# Altium PCB LSE_Piezo_Driver.PcbDoc
Units mil, origin at the board's own origin, x right, y up, seen from the top; angles counter-clockwise.
Board outline 3808.03 x 6368.03 mil, 2 copper layers (Top Layer, Bottom Layer); 77 components, 75 nets, 330 pads, 16 vias.
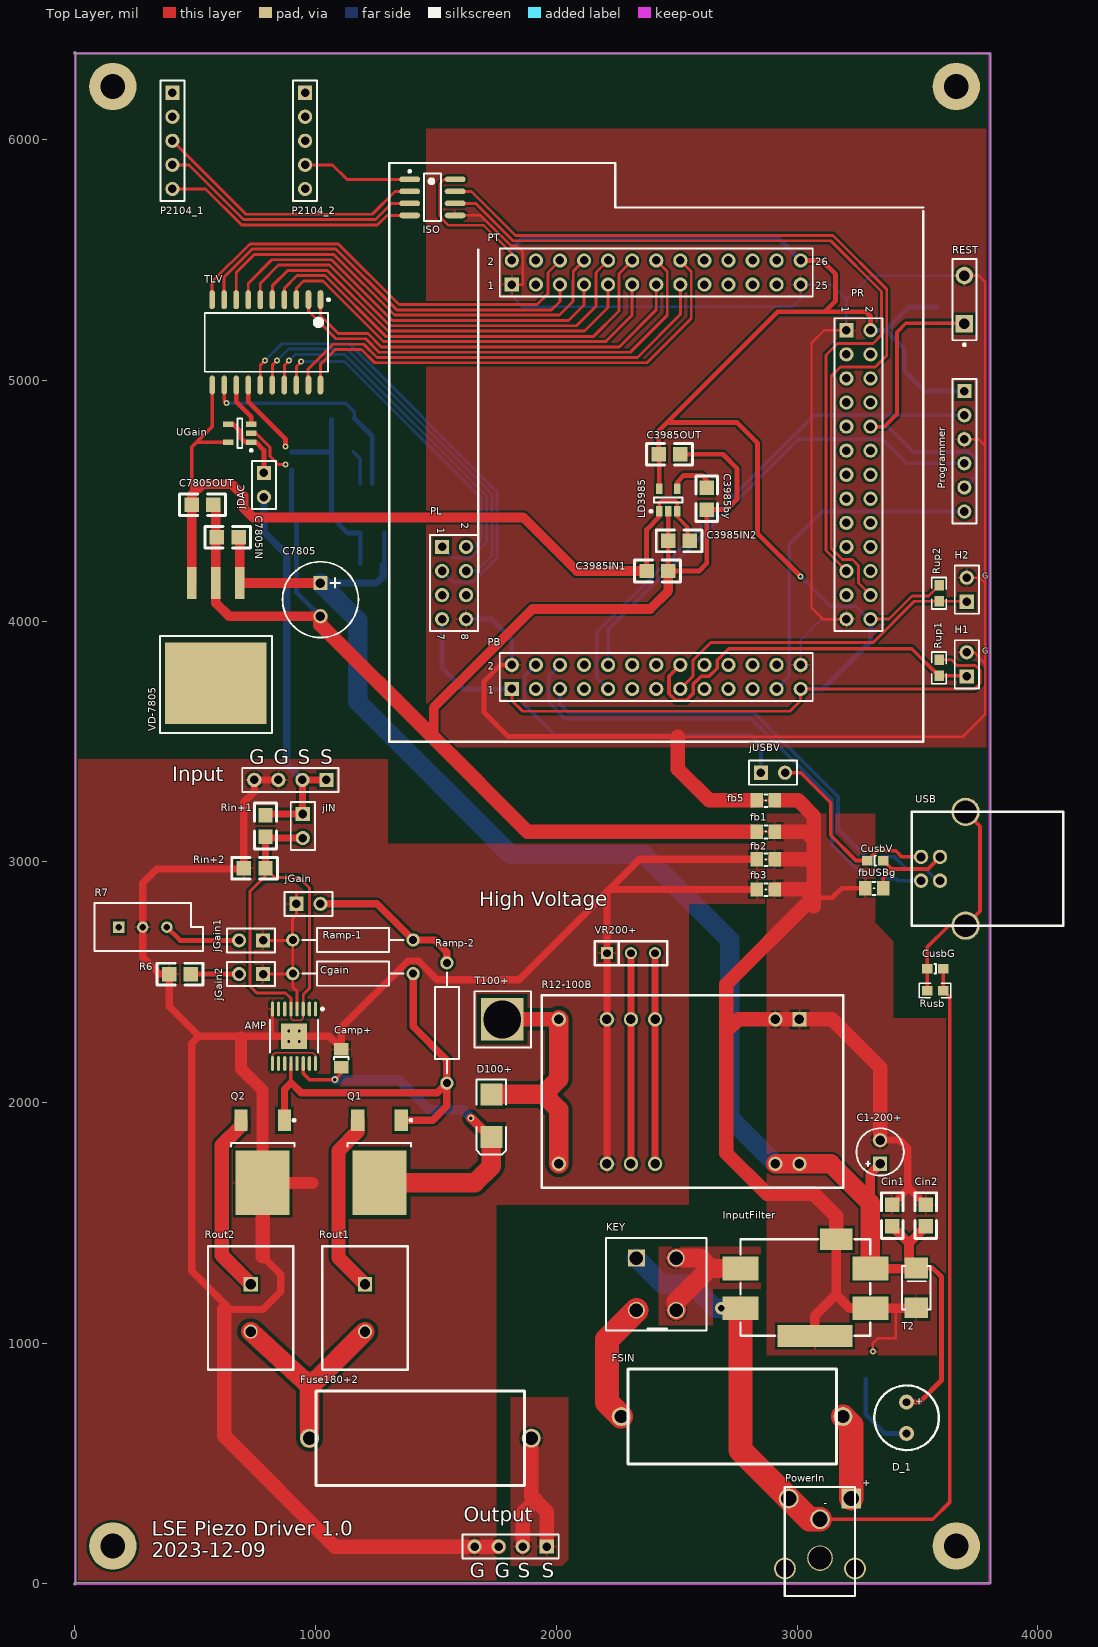
[diagram p0: Top Layer view]
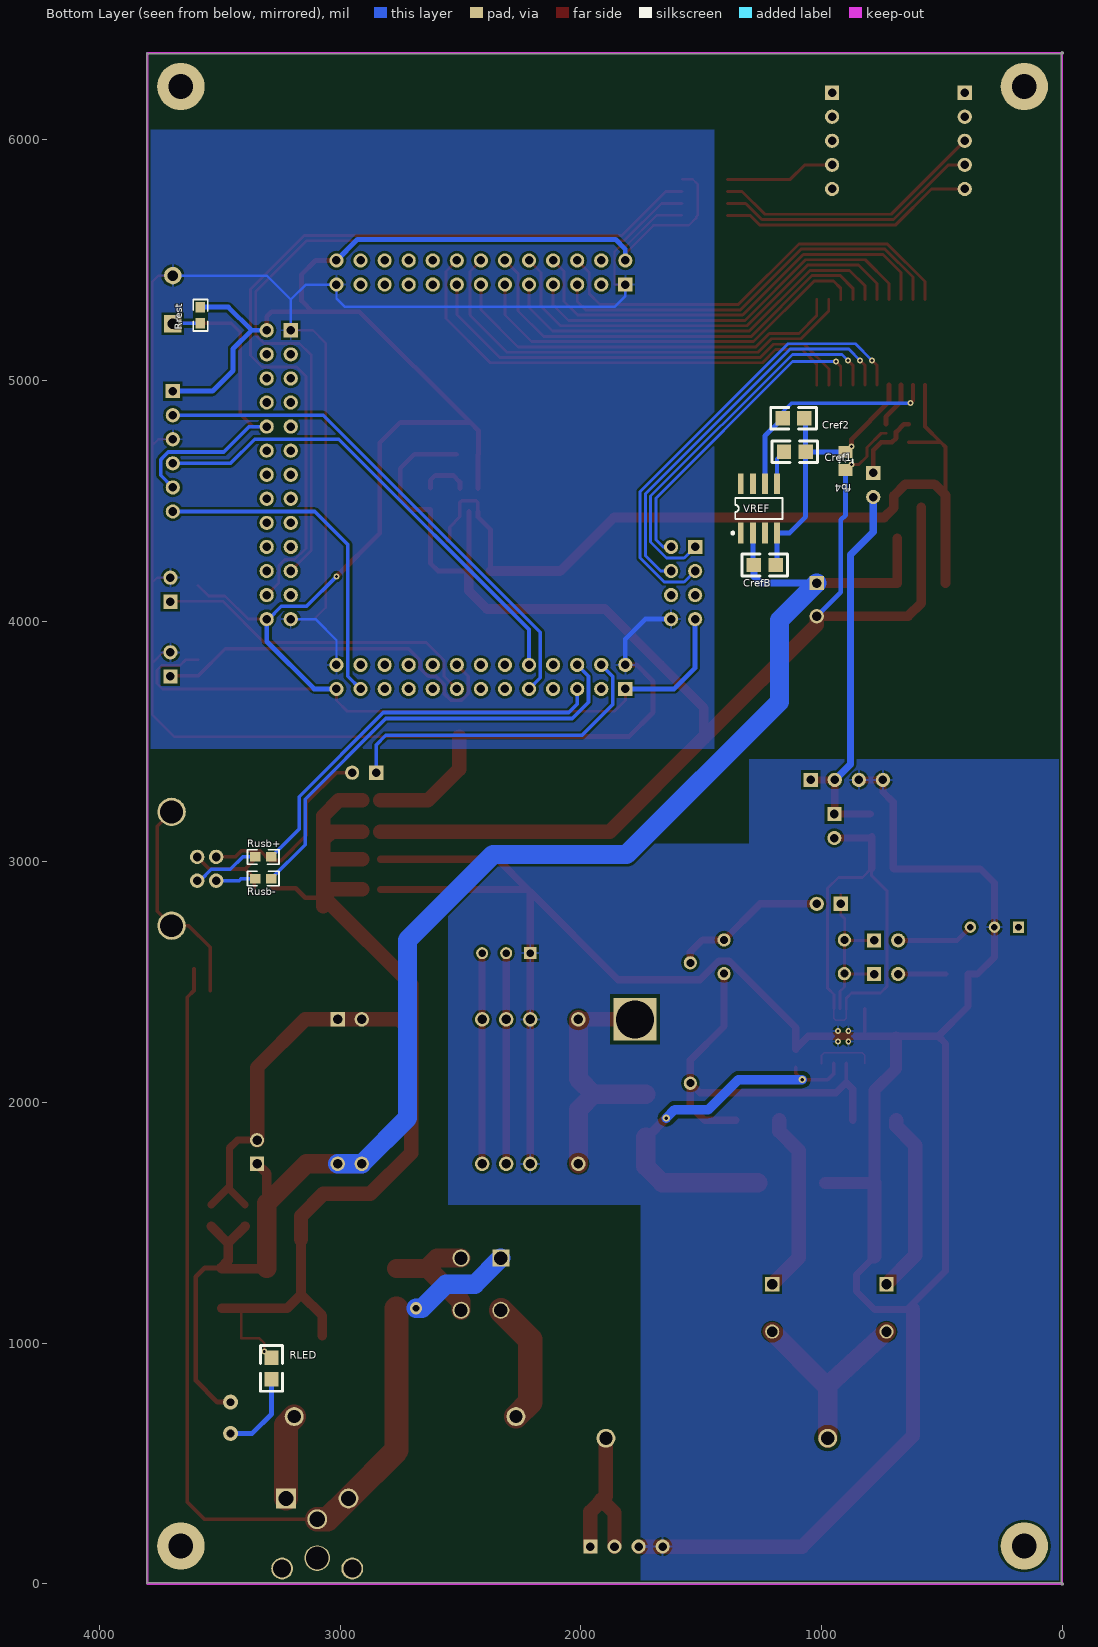
[diagram p1: Bottom Layer view, seen from below]

## Layer stack, top to bottom
Top Solder: solder mask 0.4, Solder Resist, Dk 3.5
Top Layer: signal copper 1.4
Dielectric 1: dielectric 12.6, FR-4, Dk 4.8
Bottom Layer: signal copper 1.4
Bottom Solder: solder mask 0.4, Solder Resist, Dk 3.5

## Board outline
-4.02,0 cw(c0,0) 0,4.02 3800,4.02 cw(c3800,0) 3804.02,0 3804.02,6360 cw(c3800,6360) 3800,6355.98 0,6355.98 cw(c0,6360) -4.02,6360 cw(c0,6360) 0,6364.02 cw(c0,6360) 4.02,6360 4.02,0 cw(c0,0) 0,-4.01 cw(c0,0)

## Design rules (kind name [scope] priority, off if disabled: settings)
Clearance HV [InNet('AMPGND') vs (InNet('V100+') OR InNet('NetFuse180+2_1')OR InNet('Netd100+_1'))] p1: gap=15 ignorepadtopadclearanceinfootprint=FALSE except(0: Arc-Hole Track-Hole SMDPad-Hole THPad-Hole Via-Hole Fill-Hole Poly-Hole Region-Hole Text-Hole)
Clearance Clearance_1 [All] p2: gap=10 ignorepadtopadclearanceinfootprint=FALSE except(0: Arc-Hole Track-Hole SMDPad-Hole THPad-Hole Via-Hole Fill-Hole Poly-Hole Region-Hole Text-Hole)
DiffPairsRouting [All] p1: maxlimit=10 minlimit=10 mostfreqgap=10 toplayer_minwidth=15 toplayer_maxwidth=15 toplayer_prefwidth=15 bottomlayer_minwidth=15 bottomlayer_maxwidth=15 bottomlayer_prefwidth=15 maxuncoupledlength=500
HoleSize [All] p1: absolutevalues=TRUE maxlimit=100 minlimit=11.81 maxpercent=80.000 minpercent=20.000
PolygonConnect [All] p1: connectstyle=Relief reliefconductorwidth=10 reliefentries=4 polygonreliefangle="90 Angle" airgapwidth=10
RoutingVias [All] p1: holewidth=28 width=50 viastyle="Through Hole" minholewidth=11.81 minwidth=20 maxholewidth=28 maxwidth=50
SolderMaskExpansion [All] p1: expansion=4 istentingtop=FALSE
Width [All] p1: maxlimit=100 minlimit=6 preferedwidth=10
Width 12V [(InNet('IN+12') OR InNet('INGND'))] p2: maxlimit=100 minlimit=10 preferedwidth=20
28 further rules are at their usual default settings.

## Classes and differential pairs
component class AMP: AMP Camp+ Cgain Fuse180+2 Input j4 jDAC jGain jGain1 jGain2 jIN Output Q1 Q2 R1 R2 R6 R7 Ramp-1 Ramp-2 Rin+1 Rin+2 Rout1 Rout2
component class power: C1-200+ C3985by C3985IN1 C3985IN2 C3985OUT C7805 C7805IN C7805OUT Cin1 Cin2 Cref1 Cref2 CrefB D100+ D_1 fb1 fb2 fb3 fb4 fb5 FSIN InputFilter KEY LD3985 "Power Filter" PowerIn R12-100B R12-150B+ RLED T2 T100+ VD-7805 VR200+ VREF
component class piezo_driver: CusbG CusbV fbUSBg H1 H2 ISO j3 j4 jUSBV Lusb P2104_1 P2104_2 PB PL PR Programmer PT REST Rrest Rup1 Rup2 Rusb Rusb+ Rusb- TLV UGain USB
differential pair INUSB: +INUSB_P -INUSB_N
differential pair USB: +USB_P -USB_N

## Components (designator, comment, footprint, x,y, rotation, side; value= is the part's Value field where it differs from the comment)
AMP "LTC6090HFE#PBF" LT-FE-16-EPV-BA_N 910,2275 r270 top
C1-200+ "?" Cap_Rad2.5 3345,1745 r90 top
C3985by "10n" 0805 2625,4462.8 r90 top
C3985IN1 "1u" 0805 2465,4207.8 r180 top
C3985IN2 "100n" 0805 2465,4332.8 r0 top
C3985OUT "1u" 0805 2515,4692.8 r180 top
C7805 "?" Cap_Rad4mm 1020,4157.8 r270 top
C7805IN "0.33u" 0805 590,4347.8 r0 top
C7805OUT "0.1u" 0805 575,4482.8 r180 top
Camp+ "445-6808-1-ND" C_0805 1106.65,2183.35 r270 top
Cgain "?" AXIAL-0.5 1155,2535 r0 top
Cin1 "Cap" 0805 3395,1485 r90 top
Cin2 "Cap" 0805 3535,1485 r90 top
Cref1 "1u" 0805 1065.94,4702.8 r0 bottom
Cref2 "22u" 0805 1070.94,4842.8 r0 bottom
CrefB "1u" 0805 1190.94,4232.8 r0 bottom
CusbG "?" C_0603 3573.93,2555 r180 top
CusbV "?" C_0603 3325,3005 r0 top
D100+ "Diode 1N4007" SMB 1730,1945 r270 top
D_1 "LED" LIGHT 3455,755 r270 top
fb1 "MH2029-300YCT-ND" FB_0805 2870,3125 r180 top
fb2 "MH2029-300YCT-ND" FB_0805 2870,3010 r180 top
fb3 "MH2029-300YCT-ND" FB_0805 2870,2885 r180 top
fb4 "MH2029-300YCT-ND" FB_0805 900,4665 r270 bottom
fb5 "MH2029-300YCT-ND" FB_0805 2870,3255 r180 top
fbUSBg "MH2029-300YCT-ND" FB_0805 3320,2890 r180 top
FSIN "Fuse" FuseHolder 2730,695 r180 top
Fuse180+2 "Fuse" FuseHolder 1435,605 r0 top
H1 "Header 2" HDR1X2 3705,3770 r90 top
H2 "Header 2" HDR1X2 3705,4080 r90 top
Input "Header 4" HDR1X4 1045,3340 r180 top
InputFilter "BNX022" BNX022 2690,985 r0 top
ISO "ISO7221CDR" D0008A_N 1485,5760 r0 top
jDAC "Jumper" HDR1X2 785,4615 r270 top
jGain "Jumper" HDR1X2 920,2825 r0 top
jGain1 "Jumper" HDR1X2 781.65,2673.35 r180 top
jGain2 "Jumper" HDR1X2 781.65,2533.35 r180 top
jIN "Jumper" HDR1X2 946.65,3198.35 r270 top
jUSBV "Jumper" HDR1X2 2850,3370 r0 top
KEY "Header 2X2" Power4Pin 2415,1245 r0 top
LD3985 "LD3985G33R" TSOT23-5L_N 2465,4502.8 r90 top
Output "Header 4" HDR1X4 1960,155 r180 top
P2104_1 "Header 5" HDR1X5 405,6195 r270 top
P2104_2 "Header 5" HDR1X5 956.18,6195 r270 top
PB "Header 13X2" HDR2X13 1815,3717.8 r0 top
PL "Header 4X2" HDR2X4 1525,4307.8 r270 top
PowerIn "Header 4" AC/DC3 3225,355 r0 top
PR "Header 13X2" HDR2X13 3205,5207.8 r270 top
Programmer "Header 6" HDR1X6 3695,4955 r270 top (schematic designator P5)
PT "Header 13X2" HDR2X13 1815,5397.8 r0 top
Q1 "IRFR120N" INF-PG-TO252 1265,1745 r270 top
Q2 "IRFR9120N" INF-PG-TO252 780,1745 r270 top
R6 "?" 0805 391.65,2533.35 r0 top
R7 "RPot" VR5 281.65,2728.35 r0 top
R12-100B "R12-150B" R12-150B 3010,2345 r180 top
Ramp-1 "?" AXIAL-0.5 1155,2675 r0 top
Ramp-2 "?" AXIAL-0.5 1545,2330 r270 top
REST "SW-PB" SPST-2 3695,5335 r90 top (schematic designator S1)
Rin+1 "?" 0805 791.65,3193.35 r270 top
Rin+2 "?" 0805 701.65,2973.35 r0 top
RLED "?" 0805 3285,850 r90 bottom
Rout1 "?" Res_5w 1205,1245 r270 top
Rout2 "?" Res_5w 730,1245 r270 top
Rrest "?" 0603 3580,5235 r90 bottom
Rup1 "?" 0603 3590,3770 r90 top
Rup2 "?" 0603 3590,4080 r90 top
Rusb "?" 0603 3608.93,2465 r180 top
Rusb+ "?" 0603 3355,3020 r180 bottom
Rusb- "?" 0603 3355,2930 r180 bottom
T2 "SMAJ150CA-E3/61GICT-ND" DO-214AC 3495,1230 r270 top
T100+ "Socket" hole 1775,2345 r0 top
TLV "TLV5619" DW020_L 795,5157.8 r270 top
UGain "OPA333AIDBVR" TI-DBV5_N 685,4780 r180 top
USB "USB" USB-B 3515,3020 r180 top
VD-7805 "LM7805" 7805 685,4157.8 r90 top
VR200+ "RPot" VR 2210,2620 r0 top
VREF "REF5025" SO8 1260,4467.8 r180 bottom

## Footprints (in the part's own frame and the unit in brackets; to place one, negate y for a bottom-side part, rotate by r counter-clockwise, add the part's x,y. Pads: shape width x height; smd on the part's side, far side on the other; paste and mask are expansions set on the pad)
0603 [mm]
  rect 1.1x1 smd: 1(0.051,0) 2(1.751,0)
  silkscreen extent -0.76,-0.76 2.57,0.76
0805 [mil]
  rect 60x60 smd: 1(0,0) 2(90,0)
  silkscreen extent -50,-45 140,45
7805 [mm]
  rect 3.4x1 smd: 1(0,0) 2(0,2.54) 3(0,5.08)
  rect 8.6x10.7 smd: 4(-10.6,2.54)
  silkscreen extent -15.82,-3.4 -5.59,8.43
AC/DC3 [mm]
  rect 2.1x2.1 hole 1.6: 1(0,0)
  round 2.1 hole 1.6: 2(-3.3,-2.2) 3(-6.6,0)
  round 2.3 hole 1.9: 4(-7,-7.4) 5(0.4,-7.4)
  round 2.7 hole 2.4: 6(-3.3,-6.3)
  silkscreen extent -7.01,-10.3 0.4,1.2
AXIAL-0.5 [mm] "Axial Device, Thru-Hole; 2 Leads; 0.5 in Pin Spacing"
  round 1.4 hole 0.85: 1(-6.35,0) 2(6.35,0)
  silkscreen extent -5.33,-1.27 5.33,1.27
BNX022 [mm] "EMI Filter"
  rect 3.8x2.5 smd: 1(1.9,8.25) 2(15.6,8.25) 3(1.9,4.05) 4(15.6,4.05)
  rect 7.9x2.3 smd: 4(9.75,1.15)
  rect 3.4x2.3 smd: 4(12,11.35)
  silkscreen extent 1.9,1.15 15.6,11.35, body extent 2.12,1.38 15.38,11.12, height 3.1
C_0603 [mm] "Chip Capacitor; Body 1.6 x 0.8 mm (LxW typ)"
  rect 1.1x1 smd: 1(-0.85,0) 2(0.85,0)
  silkscreen extent -0.1,-0.51 0.1,0.51, body extent -0.76,-0.38 0.76,0.38, height 0.46
C_0805 [mm] "capacitor, 0805"
  rect 1.3x1.5 smd: 1(-0.95,0) 2(0.95,0)
  silkscreen extent -0.13,-0.76 0.13,0.76, body extent -1.02,-0.64 1.02,0.64, height 0.64
Cap_Rad2.5 [mm] "PartNO 493-3283-ND: radius=4mm, pins space=3.5 mm, height=9mm"
  rect 1.5x1.5 hole 1: 1(0,0)
  round 1.5 hole 1: 2(2.5,0)
  silkscreen extent -1.25,-2.5 3.75,2.5, body extent -1.26,-2.52 3.72,2.47, height 9
Cap_Rad4mm [mm] "PartNO 493-3283-ND: radius=4mm, pins space=3.5 mm, height=9mm"
  rect 1.5x1.5 hole 1: 1(0,0)
  round 1.5 hole 1: 2(3.5,0)
  silkscreen extent -2.25,-4 5.75,4, body extent -2.31,-3.94 5.66,4.05, height 9
D0008A_N [mm] "SOIC, 8-Leads, Body 5x4mm, Pitch 1.27mm, IPC Medium Density"
  oval 2.2x0.6 smd: 1(-2.4,1.905) 2(-2.4,0.635) 3(-2.4,-0.635) 4(-2.4,-1.905) 5(2.4,-1.905) 6(2.4,-0.635) 7(2.4,0.635) 8(2.4,1.905)
  silkscreen extent -2.52,-2.5 0.9,2.88, body extent -2,-2.5 2,2.5, height 1.75
DO-214AC [mm] "TVS"
  rect 2.2x2.5 smd: A(2.1,0) K(-2.1,0)
  silkscreen extent -2.3,-1.5 2.3,1.5, body extent -2.6,-1.5 2.6,1.5, height 2
DW020_L [mm]
  oval 2x0.6 smd: 1(-4.5,5.715) 2(-4.5,4.445) 3(-4.5,3.175) 4(-4.5,1.905) 5(-4.5,0.635) 6(-4.5,-0.635) 7(-4.5,-1.905) 8(-4.5,-3.175) 9(-4.5,-4.445) 10(-4.5,-5.715) 11(4.5,-5.715) 12(4.5,-4.445) 13(4.5,-3.175) 14(4.5,-1.905) 15(4.5,-0.635) 16(4.5,0.635) 17(4.5,1.905) 18(4.5,3.175) 19(4.5,4.445) 20(4.5,5.715)
  silkscreen extent -4.62,-6.5 3.1,6.69, body extent -3.75,-6.4 3.75,6.4, height 2.65
FB_0805 [mm] "chip body,  2.00mm x 1.25mm"
  rect 1.3x1.5 smd: 1(-0.95,0) 2(0.95,0)
  silkscreen extent -0.18,-0.64 0.15,0.71, body extent -1.02,-0.64 1.02,0.64, height 0.46
FuseHolder [mm]
  round 2 hole 1.4: 1(-11.7,0) 2(11.7,0)
  silkscreen extent -11,-5 11,5, body extent -11,-5 11.02,4.98, height 13
HDR1X2 [mm] "Connector; Header; 2 Position"
  rect 1.5x1.5 hole 0.9: 1(0,0)
  round 1.5 hole 0.9: 2(2.54,0)
  silkscreen extent -1.27,-1.27 3.81,1.27
HDR1X4 [mm] "Connector; Header; 4 Position"
  rect 1.5x1.5 hole 0.9: 1(0,0)
  round 1.5 hole 0.9: 2(2.54,0) 3(5.08,0) 4(7.62,0)
  silkscreen extent -1.27,-1.27 8.89,1.27
HDR1X5 [mm] "Connector; Header; 5 Position"
  rect 1.5x1.5 hole 0.9: 1(0,0)
  round 1.5 hole 0.9: 2(2.54,0) 3(5.08,0) 4(7.62,0) 5(10.16,0)
  silkscreen extent -1.27,-1.27 11.43,1.27
HDR1X6 [mm] "Connector; Header; 6 Position"
  rect 1.5x1.5 hole 0.9: 1(0,0)
  round 1.5 hole 0.9: 2(2.54,0) 3(5.08,0) 4(7.62,0) 5(10.16,0) 6(12.7,0)
  silkscreen extent -1.27,-1.27 13.97,1.27
HDR2X4 [mm] "Connector; Header; 4x2 Position"
  rect 1.5x1.5 hole 0.9: 1(0,0)
  round 1.5 hole 0.9: 2(0,2.54) 3(2.54,0) 4(2.54,2.54) 5(5.08,0) 6(5.08,2.54) 7(7.62,0) 8(7.62,2.54)
  silkscreen extent -1.27,-1.27 8.89,3.81
HDR2X13 [mm] "Connector; Header; 13x2 Position"
  rect 1.5x1.5 hole 0.9: 1(0,0)
  round 1.5 hole 0.9: 2(0,2.54) 3(2.54,0) 4(2.54,2.54) 5(5.08,0) 6(5.08,2.54) 7(7.62,0) 8(7.62,2.54) 9(10.16,0) 10(10.16,2.54) 11(12.7,0) 12(12.7,2.54) 13(15.24,0) 14(15.24,2.54) 15(17.78,0) 16(17.78,2.54) 17(20.32,0) 18(20.32,2.54) 19(22.86,0) 20(22.86,2.54) 21(25.4,0) 22(25.4,2.54) 23(27.94,0) 24(27.94,2.54) 25(30.48,0) 26(30.48,2.54)
  silkscreen extent -1.27,-1.27 31.75,3.81
hole [mm]
  rect 4.5x4.5 hole 4: 1(0,0)
  silkscreen extent -2.92,-2.97 3.05,2.97
INF-PG-TO252 [mm] "DPAK, 3-Leads, Body 6.57x6.1mm, Pitch 2.29mm, IPC High Density"
  rect 2.3x1.4 smd: 1(-4.6,2.29) 3(-4.6,-2.29)
  rect 6.8x5.7 smd: 2(2,0)
  silkscreen extent -4.72,-3.35 -1.8,3.44, body extent -2.2,-3.37 4.02,3.37, height 2.41
LIGHT [mil]
  round 62 hole 32: A(0,0) K(129.92,0)
  silkscreen extent -69,-134 199,134
LT-FE-16-EPV-BA_N [mm] "SOP, 16-Leads, Body 5x4.4mm, Pitch 0.65mm, Thermal Pad 2.74x2.74mm, IPC Medium Density"
  oval 1.55x0.35 smd: 1(-2.875,2.275) 2(-2.875,1.625) 3(-2.875,0.975) 4(-2.875,0.325) 5(-2.875,-0.325) 6(-2.875,-0.975) 7(-2.875,-1.625) 8(-2.875,-2.275) 9(2.875,-2.275) 10(2.875,-1.625) 11(2.875,-0.975) 12(2.875,-0.325) 13(2.875,0.325) 14(2.875,0.975) 15(2.875,1.625) 16(2.875,2.275)
  rect 2.74x2.74 smd: 17(0,0)
  silkscreen extent -3,-2.55 1.7,3.13, body extent -2.25,-2.55 2.25,2.55, height 1.1
Power4Pin [mm]
  rect 1.8x1.8 hole 1.4: 1(-2.1,2.75)
  round 1.8 hole 1.4: 2(2.1,2.75) 3(2.1,-2.75) 4(-2.1,-2.75)
  silkscreen extent -5.3,-4.88 5.3,4.88
R12-150B [mil]
  rect 60x60 hole 39.37: 2(0,0)
  round 60 hole 39.37: 3(100,0) 8(600,0) 9(700,0) 10(800,0) 12(1000,0) 13(1000,600) 15(800,600) 16(700,600) 17(600,600) 22(100,600) 23(0,600)
  silkscreen extent -181,-100 1071,700
Res_5w [mm] "pin_distance=5mm, radius=5mm"
  rect 1.5x1.5 hole 1.1: 1(0,0)
  round 1.5 hole 1.1: 2(5,0)
  silkscreen extent -4,-4.5 9.02,4.5, body extent -4.22,-4.98 9.22,5, height 25
SMB [mm] "DO-214-AA/SMB; 2 C-Bend Leads; Body 5.3 x 3.6 mm, inc. leads (LxW)"
  rect 2.3x2.3 smd: 1(-2.25,0) 2(2.25,0)
  silkscreen extent -3.8,-1.55 4.1,1.55
SO8 [mm]
  rect 0.6x2.2 smd: 1(-1.905,-2.6) 2(-0.635,-2.6) 3(0.635,-2.6) 4(1.905,-2.6) 5(1.905,2.6) 6(0.635,2.6) 7(-0.635,2.6) 8(-1.905,2.6)
  silkscreen extent -2.88,-2.72 2.5,1.1
SPST-2 [mm] "Switch; 2 Leads"
  rect 1.85x1.85 hole 1.1: 1(-2.54,0)
  round 1.85 hole 1.1: 2(2.54,0)
  silkscreen extent -4.89,-1.27 4.28,1.27
TI-DBV5_N [mm] "SOT23, 5-Leads, Body 2.9x1.6mm, Pitch 0.95mm, IPC Medium Density"
  rect 1.1x0.6 smd: 1(-1.2,0.95) 2(-1.2,0) 3(-1.2,-0.95) 4(1.2,-0.95) 5(1.2,0.95)
  silkscreen extent -1.33,-1.55 0.25,1.92, body extent -0.87,-1.52 0.87,1.53, height 1.45
TSOT23-5L_N [mm] "SOT23, 5-Leads, Body 2.9x1.6mm, Pitch 0.95mm, Lead Span 2.8mm, IPC Medium Density"
  rect 1.1x0.65 smd: 1(-1.2,0.95) 2(-1.2,0) 3(-1.2,-0.95) 4(1.2,-0.95) 5(1.2,0.95)
  silkscreen extent -1.32,-1.5 0.25,1.95, body extent -0.85,-1.5 0.85,1.5, height 1.1
USB-B [mm]
  round 1.524 hole 0.92: 1(0,0) 2(0,2.5) 3(-2,2.5) 4(-2,0)
  round 3 hole 2.4: 5(-4.7,7.25) 6(-4.7,-4.75)
  silkscreen extent -15,-4.75 1,7.25
VR [mil]
  rect 50x50 hole 32: 1(0,0)
  round 50 hole 32: 2(200,0) 3(100,0)
  silkscreen extent -50,-50 250,50
VR5 [mm] "Thru-Hole; 3 Leads"
  rect 1.2x1.2 hole 0.7: 1(-2.54,0)
  round 1.2 hole 0.7: 2(0,0) 3(2.54,0)
  silkscreen extent -5.08,-2.54 6.35,2.54

## Part data
AMP: "Single Channel, Picoamp Input Current, CMOS Operational Amplifier, RRO, 10 MHz Typical GBW, 19 V/us Typical SR, 9.5 to 140 V, 16-Pin SOP (FE-16), High Temperature / Automotive, Pb-Free"
C1-200+ C7805: library part Cpol, "Capacitor (Semiconductor SIM Model)"
C3985by C3985IN1 C3985IN2 C3985OUT C7805IN C7805OUT Cref1 Cref2 CrefB: library part Cap, "Capacitor"
Camp+ CusbG CusbV: library part Csemi, "Capacitor (Semiconductor SIM Model)"
Cgain: library part Cfilm, "Capacitor (Semiconductor SIM Model)"
Cin1 Cin2: "Capacitor"
D100+: "1 Amp General Purpose Rectifier"
D_1: library part LED0, "Typical INFRARED GaAs LED"
fb1 fb2 fb3 fb4 fb5 fbUSBg: library part FerriteBead, "Ferrite bead"
H1 H2: "Header, 2-Pin"
Input Output PowerIn: "Header, 4-Pin"
ISO: "25 Mbps Dual Channels, 1 / 1, Digital Isolator, 3.3 V / 5 V, -40 to +125 degC, 8-pin SOIC (D), Green (RoHS & no Sb/Br)"
jDAC jGain jGain1 jGain2 jIN jUSBV: "solderable jumper"
KEY: "Header, 2-Pin, Dual row"
LD3985: "150mA, Ultra-Low Drop Low Noise BiCMOS Voltage Regulators Low ESR Capacitors Compatible, 3.3V, 5-Pin TSOT23-5L"
P2104_1 P2104_2: "Header, 5-Pin"
PB PR PT: "Header, 13-Pin, Dual row"
PL: "Header, 4-Pin, Dual row"
Programmer: "Header, 6-Pin"
Q1: "N-Channel OptiMOS Small-Signal-Transistor, 60 V VDS, 0.3?A ID, -55 to 150 degC, PG-SOT23, Reel, Green"
Q2: "P-Channel OptiMOS P Small-Signal-Transistor, -30?V VDS, -5.5?A ID, -55 to 150 degC, PG-TSOP-6, Reel, Green"
R6 Rin+1 Rin+2 RLED Rout1 Rout2 Rrest Rup1 Rup2 Rusb Rusb+ Rusb-: library part Rsemi, "Semiconductor Resistor, SMD"
R7 VR200+: "Potentiometer"
Ramp-1 Ramp-2: library part Rth, "Semiconductor Resistor, SMD"
REST: "Switch"
T2: library part TVS_Bi, "TVS, Bidirectional"
UGain: "17 uA, MicroPower, Precision, Zero Drift CMOS Operational Amplifier, 1.8 to 5.5 V, -40 to 125 degC, 5-pin SOT23 (DBV5), Green (RoHS & no Sb/Br)"
VREF: library part REF5050

## Free pads (board coordinates)
  round 196.85 hole 102.36: 0(157.48,157.48) 0(157.48,6220.47) 0(3661.42,157.48) 0(3661.42,6220.47)

## Via types
v1: diameter 25, hole 12, Top Layer to Bottom Layer, tented both sides, 9 vias
v2: diameter 23.62, hole 11.81, Top Layer to Bottom Layer, 4 vias
v3: diameter 30, hole 15, Top Layer to Bottom Layer, tented both sides, 2 vias
v4: diameter 50, hole 28, Top Layer to Bottom Layer, tented both sides, 1 vias

## Nets (pads, with @x,y where several pads share a name; then routed paths per layer and width w, separated by ;. In a path a pad name is that pad's centre, name@x,y a point inside that pad or via, vN(x,y) a via of type N, cw(c..) or ccw(c..) an arc to the next point about the centre after c; other vN are vias at no path point)
ADGND: Cref1.1 Cref2.1 CrefB.1 fb4.1 TLV.14 VREF.4 | length 1164
  Top Layer w20: TLV.14 720,4910 875,4755 v1(875,4725)
  Bottom Layer w20: fb4.1 Cref1.1@1065.55,4702.4 ; Cref2.1@1065.94,4837.8 Cref1.1 1065.94,4432.8 1133.31,4365.43 VREF.4 CrefB.1@1185,4238.74
AMP_IN+: AMP.3 AMP.5 jIN.2 Rin+1.2 Rin+2.2 | length 1897.1
  Top Layer w6: AMP.5 897.21,2349.73 905,2341.94 940,2341.94 948.39,2350.32 AMP.3
  Top Layer w12: AMP.5 897.21,2432.8 875,2455 755,2455 727.18,2482.82 727.18,2877.18 791.65,2941.65 Rin+2.2 830,2935 930,2935 974.47,2890.53 974.47,2474.47 948.39,2448.39 AMP.3
  Top Layer w30: Rin+2.2 Rin+1.2 ; Rin+1.2@796.65,3098.35 jIN.2
AMP_IN-: AMP.4 Cgain.1 jGain1.1 jGain2.1 jGain.1 Ramp-1.1 | length 727.8
  Top Layer w12: jGain2.1 Cgain.1@903.35,2533.35 ; jGain1.1 Ramp-1.1@903.35,2673.35 ; Ramp-1.1@903.35,2681.69 903.35,2763.35 920,2780 920,2865 ; Ramp-1.1 Cgain.1 905,2480 922.8,2462.21 AMP.4
AMP_OUT: AMP.12 Cgain.2 Q1.1 Q2.1 Ramp-2.2 | length 1750.6
  Top Layer w15: 897.21,2082.8 AMP.12
  Top Layer w30: Q2.1 870.16,2055.16 897.21,2082.21 ; 897.21,2082.8 940,2040 1505,2040 Ramp-2.2 ; Q1.1 1486.1,1926.1 1545,1985 Ramp-2.2 ; Cgain.2 1405,2315 1545,2175 Ramp-2.2
AMPGND: AMP.8 AMP.17 Camp+.1 fb2.2 fb3.2 Input.3 Input.4 Output.3 Output.4 Q2.2 R6.1 R7.2 R12-100B.10 R12-100B.15 Rin+2.1 VR200+.1 | length 10986.1
  Top Layer w15: 820.43,2279.57 AMP.8
  Top Layer w30: 620,1140 780,1140 855,1215 855,1285 780,1360 ; 645,1140 485,1300 485,2245 515,2275 ; Input.3 Input.4 745,3290 701.65,3246.65 Rin+2.1 698.31,2970 340,2970 281.65,2911.65 R7.2 281.65,2603.35 351.65,2533.35 R6.1 391.65,2398.35 515,2275 ; Camp+.1 Camp+.1@1106.65,2223.35 ; R12-100B.15 R12-100B.10 VR200+.1 2210,2875 ; fb3.2 2220,2885 ; fb2.2 2345,3010 2220,2885 ; 515,2275 AMP.17 1055,2275 Camp+.1@1106.65,2223.35 ; Camp+.1@1106.65,2223.35 1106.65,2310.98 1383.23,2587.56 1426.77,2587.56 1504.33,2510 1845,2510 2210,2875 ; 2210,2875 2220,2885
  Top Layer w50: 690,2270 690,2140 780,2050 Q2.2 986.26,1666.26
  Top Layer w60: 620,1140 620,615 1080,155 Output.4 Output.3 ; 780,1360 Q2.2
  other v2: 888.35,2253.35 931.65,2253.35 888.35,2296.65 931.65,2296.65
CS1: PL.2 TLV.18 | length 1335.9
  Top Layer w12: TLV.18 920,5057.8 v1(940,5077.8)
  Bottom Layer w12: v1(940,5077.8) 1120,5077.8 1687.8,4510 1687.8,4337.8 1657.8,4307.8 PL.2
D5V: C3985IN1.2 C3985IN2.2 C7805OUT.2 LD3985.1 LD3985.3 TLV.11 UGain.5 VD-7805.3 | length 3648.1
  Top Layer w15: 485,4522.8 485,4722.8 504.8,4742.6 ; TLV.11 570,4807.8 504.8,4742.6 ; UGain.5 504.8,4742.6 ; LD3985.1 2427.6,4492.6 2435,4500 2495,4500 2502.4,4492.6 LD3985.3 2502.4,4432.6 2545,4390 2545,4342.8 C3985IN2.2
  Top Layer w20: C3985IN1.2 2375,4380 2427.6,4432.6 LD3985.1
  Top Layer w40: VD-7805.3 C7805OUT.2 485,4522.8 531.1,4568.9 651.1,4568.9 700,4520 700,4470 740,4430 1862.8,4430 2085,4207.8 C3985IN1.2
DAC_OUT: jDAC.1 UGain.1 UGain.4 | length 301.4
  Top Layer w20: UGain.4 657.6,4817.4 690,4785 690,4760 707.4,4742.6 UGain.1 752.4,4742.6 785,4710 jDAC.1
DGND: C3985by.1 C3985IN1.1 C3985IN2.1 C3985OUT.1 C7805.2 C7805IN.1 C7805OUT.1 fb1.2 fb4.2 LD3985.2 UGain.2 VD-7805.2 | length 6504.4
  Top Layer w12: UGain.2 751.77,4780 811,4720.77 811,4684 845,4650 v1(875,4650) ; 1657.2,3817.8 1667.8,3817.8
  Top Layer w20: LD3985.2 C3985IN2.1 C3985IN1.1 2592.8,4207.8 2625,4240 C3985by.1 2707.8,4462.8 2750,4505 2750,4635 2692.21,4692.8 C3985OUT.1
  Top Layer w40: C7805OUT.1@585,4472.8 VD-7805.2 585,4075 640,4020 C7805.2 ; 1490,3515 1490,3640 1667.8,3817.8 1900,4050 2390,4050 2465,4125 C3985IN1.1
  Top Layer w60: C7805.2 1020,3985 1490,3515 1880,3125 fb1.2
  Bottom Layer w20: fb4.2 900,4440 920,4420 920,4120 C7805.2
DVCC: C3985OUT.2 ISO.8 LD3985.5 PB.1 PB.25 PL.7 PR.2 PR.26 Programmer.1 PT.2 PT.26 Rrest.2 Rup1.2 Rup2.2 | length 9501.4
  Top Layer w10: ISO.8 1535,5835 1515,5815 1515,5685 1521.18,5678.82 1521.18,5673.89 1551.57,5643.51 1698.51,5643.51 1815,5527.02 PT.2
  Top Layer w12: PB.1 1815,3670 1860,3625 2970,3625 3015,3670 PB.25 3737.8,3717.8 3760,3740 3760,3796.68 3741.16,3815.53 3664.47,3815.53 3641.07,3838.93 Rup1.2 ; PR.26 3381.68,4007.8 3477.89,4104 3546,4104 Rup2.2@3590,4148
  Top Layer w20: C3985OUT.2 2425,4790 2460,4825 ; LD3985.5 C3985OUT.2@2427.6,4690.2 ; v1(3015,4185) 2835,4365 2835,4740 2750,4825 2460,4825 ; PT.26 3102.2,5497.8 3160,5440 3160,5330 3115,5285 ; PR.2 3305,5265 3285,5285 3115,5285 ; 2460,4825 2920,5285 3115,5285
  Bottom Layer w15: v1(3015,4185) 3139.23,4060.77 3244.23,4060.77 3297.2,4007.8 PR.26
  Bottom Layer w20: PL.7 1525,3805 1612.2,3717.8 PB.1 ; PT.2 1815,5545 1855,5585 2927.8,5585 PT.26 ; PB.25 3107.8,3717.8 3305,3915 PR.26 ; PR.2 3367.8,5207.8 ; Rrest.2 3463.93,5303.93 3367.8,5207.8 ; Programmer.1 3530,4955 3445,5040 3445,5130.59 3367.8,5207.8
IN+12: C1-200+.1 C7805.1 C7805IN.2 Cin1.1 Cin2.1 CrefB.2 D_1.A InputFilter.2 R12-100B.22 R12-100B.23 T2.K VD-7805.1 VREF.2 | length 6736.7
  Top Layer w20: D_1.A 3510,755 3600,845 3600,1275 3562.32,1312.68 T2.K
  Top Layer w40: C7805IN.2@685,4342.8 VD-7805.1 C7805.1 ; InputFilter.2 T2.K@3492.13,1309.8 ; 3304.17,1580.83 3304.17,1704.17 C1-200+.1 ; Cin1.1 3465,1415 ; T2.K 3465,1342.68 3465,1415 ; Cin2.1 3465,1415
  Top Layer w80: R12-100B.22 R12-100B.23 3140,1745 3304.17,1580.83 InputFilter.2
  Bottom Layer w20: CrefB.2@1285,4236.85 VREF.2
  Bottom Layer w30: C7805.1 1252.8,4157.8 1280.94,4185.94 CrefB.2
  Bottom Layer w80: C7805.1 1175,4002.8 1175,3665 1810,3030 2365,3030 2720,2675 2720,1935 R12-100B.22 R12-100B.23
INGND: C1-200+.2 Cin1.2 Cin2.2 fb1.1 fb2.1 fb3.1 fb5.1 fbUSBg.2 InputFilter.4 R12-100B.2 R12-100B.3 RLED.2 T2.A | length 5754.5
  Top Layer w10: v1(3315,965) 3315,1000 3335,1020 3410,1020 3410,1144.45
  Top Layer w20: 3080,2850 3145,2850 3185,2890 fbUSBg.2
  Top Layer w30: C1-200+.2 3426.58,1843.43 3460,1810 3460,1650 ; Cin1.2 3460,1640 3460,1650 ; Cin2.2 3460,1650
  Top Layer w40: InputFilter.4@3073.86,1030.28 3073.86,1113.98 3162.44,1202.56 ; InputFilter.4@3162.44,1431.85 3162.44,1202.56 ; T2.A@3492.13,1144.45 3410,1144.45 3304.17,1144.45 3220.55,1144.45 3162.44,1202.56
  Top Layer w60: fb3.1 3055,2885 3055,2840 2705,2490 2705,2295 ; fb2.1 3055,3010 ; fb1.1 3035,3125 3070,3090 ; fb5.1 3005,3255 3070,3190 3070,3090 ; 3070,2815 3070,3090 ; InputFilter.4@3162.44,1431.85 3162.44,1527.56 3070,1620 2875,1620 2705,1790 2705,2295 ; C1-200+.2 3345,2145 3145,2345 R12-100B.2 R12-100B.3 2755,2345 2705,2295
INUSB_N: Rusb-.1 USB.2 | length 165.5
  Bottom Layer w15: Rusb-.1 3410,2930 3418.42,2921.58 USB.2
INUSB_P: Rusb+.1 USB.3 | length 281.5
  Bottom Layer w15: Rusb+.1 3405,3020 3455.92,2969.08 3534.68,2969.08 3582.18,2921.58 USB.3
LDAC: PL.4 TLV.16 | length 1660.8
  Top Layer w12: TLV.16 820,5062.8 v1(840,5082.8)
  Bottom Layer w12: v1(840,5082.8) 887,5129.8 1130.23,5129.8 1732,4528.02 1732,4272 1667.8,4207.8 PL.4
MCU_GND: fb5.2 H1.2 H2.2 ISO.5 PB.2 PB.26 PL.8 PR.1 PR.25 Programmer.3 PT.1 PT.25 REST.2 | length 9948.8
  Top Layer w10: ISO.5 1685.3,5685 1811.3,5559 1835,5559 1860,5534 1860,5400 1857.8,5397.8 PT.1 ; 2505,3520 3690,3520 3781,3611 3781,3824 ; PR.25 3107.2,4007.8 3060,4055 3060,5155 3112.8,5207.8 PR.1 ; Programmer.3 3755,4755 3781,4729 ; REST.2 3755,5435 3781,5409 3781,4729 ; H1.2 3735,3870 3781,3824 ; H2.2 3760,4180 3781,4159 ; 3781,3824 3781,4159 ; 3781,4159 3781,4729
  Top Layer w20: PB.2 1767.8,3817.8 1700,3750 1700,3620 1800,3520 2505,3520
  Top Layer w60: 2505,3520 2505,3385 2635,3255 fb5.2
  Bottom Layer w10: PT.1 1815,5350 1860,5305 2980,5305 3015,5340 PT.25 3142.21,5397.8 3205,5335 ; PB.26 3015,3920 3102.8,4007.8 PR.25 ; PR.1 3205,5335 ; REST.2 3305,5435 3205,5335
  Bottom Layer w20: PL.8 1732.2,4007.8 1815,3925 PB.2
NetC3985by_2: C3985by.2 LD3985.4 | length 201.9
  Top Layer w20: LD3985.4 2502.4,4577.4 2530,4605 2605,4605 2625,4585 C3985by.2
NetCref1_2: Cref1.2 VREF.5 | length 144.7
  Bottom Layer w15: Cref1.2 1185,4673.74 VREF.5
NetCusbG_2: CusbG.2 Rusb.2 USB.5 USB.6 | length 899.3
  Top Layer w15: Rusb.2 3540,2645 3629.57,2734.57 USB.5 3760,2794.53 3760,3147.05 USB.6
NetD100+_1: D100+.1 R12-100B.12 R12-100B.13 T100+.1 | length 1104.1
  Top Layer w60: T100+.1 R12-100B.12
  Top Layer w80: D100+.1 1946.42,2033.58 ; R12-100B.13 2010,1970 1946.42,2033.58 ; R12-100B.12 2010,2097.17 1946.42,2033.58
NetD_1_K: D_1.K RLED.1 | length 348.1
  Bottom Layer w20: RLED.1 3285,705 3364.92,625.08 D_1.K
NetFSIN_2: FSIN.2 KEY.4 | length 517
  Top Layer w100: FSIN.2 2210,754.37 2210,1014.41 KEY.4
NetFuse180+2_1: Fuse180+2.1 Rout1.2 Rout2.2 | length 874.8
  Top Layer w60: 974.37,823.78 979.37,822.52
  Top Layer w80: Rout2.2 974.37,823.78 Fuse180+2.1 ; 979.37,822.52 Rout1.2
NetInput_1: Input.1 Input.2 jDAC.2 jIN.1 Rin+1.1 | length 1631.3
  Top Layer w30: Rin+1.1@796.65,3198.35 jIN.1 ; jIN.1@945,3200 Input.2 Input.1
  Bottom Layer w30: jDAC.2 785,4370 880,4275 880,3405 Input.2
NetInputFilter_1: InputFilter.1 KEY.2 KEY.3 | length 515
  Top Layer w80: KEY.3 2497.68,1172.68 2637.5,1312.5 2596.73,1353.27 KEY.2 ; 2640.2,1309.8 InputFilter.1
NetjGain1_2: jGain1.2 R7.3 | length 322.8
  Top Layer w20: R7.3 436.65,2673.35 jGain1.2
NetjGain2_2: jGain2.2 R6.2 | length 200
  Top Layer w20: R6.2 jGain2.2
NetjGain_2: jGain.2 Ramp-1.2 Ramp-2.1 | length 652.8
  Top Layer w30: jGain.2 1255,2825 Ramp-1.2 1495,2675 1545,2625 Ramp-2.1
NetQ1_3: Q1.3 Rout1.1 | length 759.7
  Top Layer w60: Q1.3 1174.84,1879.84 1095,1800 1095,1355 Rout1.1
NetQ2_3: Q2.3 Rout2.1 | length 763.9
  Top Layer w60: Q2.3 689.84,1902.17 610,1822.32 610,1365 Rout2.1
NetR12-100B_8: R12-100B.8 R12-100B.17 VR200+.2 | length 875
  Top Layer w30: R12-100B.17 R12-100B.8 VR200+.2
NetR12-100B_9: R12-100B.9 R12-100B.16 VR200+.3 | length 875
  Top Layer w30: R12-100B.16 VR200+.3
NetTLV_13: TLV.13 UGain.3 | length 189
  Top Layer w20: TLV.13 670,4910 732.24,4847.76 UGain.3
OUTPUT: Fuse180+2.2 Output.1 Output.2 | length 694.4
  Top Layer w60: Output.2 1860,295 1915,350 ; Fuse180+2.2 1895.63,364.37 1960,300 Output.1
PA3: PT.24
PA4: PT.21
PA5: PT.22
PA6: PT.19
PA9: jUSBV.1 PB.4 | length 1351.5
  Bottom Layer w15: PB.4 1867.97,3770.77 1867.97,3652.03 1995,3525 2810,3525 2850,3485 jUSBV.1
PA10: PB.3
PB0: PT.15 TLV.19 | length 1876.8
  Top Layer w12: TLV.19 968.89,4981.74 968.89,5046.68 1072,5149.8 1199.66,5149.8 1254.66,5094.8 2337,5094.8 2515,5272.8 PT.15
PB1: PT.16 TLV.20 | length 2010.5
  Top Layer w12: TLV.20 1020,5066.68 1081.11,5127.8 1190.55,5127.8 1245.55,5072.8 2376.11,5072.8 2560.53,5257.21 2560.53,5452.27 PT.16
PB2: PT.13 TLV.1 | length 1683.7
  Top Layer w12: TLV.1 1020,5268.91 1094.11,5194.8 1216.89,5194.8 1272.89,5138.8 2261,5138.8 2415,5292.8 PT.13
PB6: ISO.7 PR.24 | length 3504.2
  Top Layer w12: ISO.7 1647,5785 1830,5602 3149.11,5602 3372.53,5378.58 3372.53,5102.53 3325,5055 3180,5055 3142,5017 3142,4301.91 3188.91,4255 3230,4255 3255,4230 3255,4157.8 PR.24
PB7: ISO.6 PR.21 | length 3300.7
  Top Layer w12: ISO.6 1665,5735 1820,5580 3140,5580 3350.53,5369.47 3350.53,5188.94 3314.91,5153.32 3168.32,5153.32 3120,5105 3120,4292.8 PR.21
PD: PL.3 TLV.15 | length 1921.4
  Top Layer w12: TLV.15 770,5062.8 v1(790,5082.8)
  Bottom Layer w12: v1(790,5082.8) 859,5151.8 1139.34,5151.8 1754,4537.13 1754,4262.89 1653.38,4162.27 1570.53,4162.27 PL.3
PD0: H1.1 PB.16 Rup1.1 | length 1562.9
  Top Layer w15: PB.16 2467.97,3770.77 2467.97,3698.32 2495.52,3670.77 2540,3670.77 2567.97,3698.74 2567.97,3737.28 2601.47,3770.77 2634.48,3770.77 2667.97,3804.26 2667.97,3837.28 2715.7,3885 3477,3885 Rup1.1 H1.1@3703,3772
PD1: H2.1 PB.15 Rup2.1 | length 1377.8
  Top Layer w12: PB.15 2567.97,3770.77 2567.97,3837.28 2640.7,3910 3315,3910 3487,4082 Rup2.1 H2.1@3703,4082
PE7: PT.14 TLV.2 | length 1918.3
  Top Layer w12: TLV.2 970,5287.8 1085,5172.8 1207.78,5172.8 1263.78,5116.8 2306.78,5116.8 2460.53,5270.55 2460.53,5452.27 PT.14
PE8: PT.11 TLV.3 | length 1732.2
  Top Layer w12: TLV.3 920,5382.8 950,5412.8 1030,5412.8 1282,5160.8 2205,5160.8 2315,5270.8 PT.11
PE9: PT.12 TLV.4 | length 1840.5
  Top Layer w12: TLV.4 870,5382.8 922,5434.8 1039.11,5434.8 1291.11,5182.8 2155,5182.8 2260.53,5288.32 2260.53,5417.18 2260,5417.71 2260,5442.8 PT.12
PE10: PT.9 TLV.5 | length 1719.3
  Top Layer w12: TLV.5 820,5392.8 884,5456.8 1048.23,5456.8 1300.23,5204.8 2117,5204.8 2215,5302.8 PT.9
PE11: PT.10 TLV.6 | length 1843
  Top Layer w12: TLV.6 770,5402.8 846,5478.8 1057.34,5478.8 1309.34,5226.8 2084,5226.8 2165,5307.8 2165,5447.8 PT.10
PE12: PT.7 TLV.7 | length 1719.3
  Top Layer w12: TLV.7 720,5402.8 818,5500.8 1066.45,5500.8 1318.45,5248.8 2051,5248.8 2115,5312.8 PT.7
PE13: PT.8 TLV.8 | length 1860.5
  Top Layer w12: TLV.8 670,5447.8 745,5522.8 1075.56,5522.8 1327.56,5270.8 2013,5270.8 2069.47,5327.27 2069.47,5417.18 2070,5417.71 2070,5452.8 PT.8
PE14: PT.5 TLV.9 | length 1725.8
  Top Layer w12: TLV.9 620,5428.91 735.89,5544.8 1084.68,5544.8 1336.68,5292.8 1980,5292.8 2015,5327.8 PT.5
PE15: PT.6 TLV.10 | length 1816.7
  Top Layer w12: TLV.10 570,5410.02 726.78,5566.8 1093.79,5566.8 1345.79,5314.8 1920,5314.8 1965,5359.8 1965,5447.8 PT.6
PGND: CusbG.1 InputFilter.3 KEY.1 PowerIn.2 PowerIn.3 Rusb.1 | length 4272.9
  Top Layer w15: PowerIn.2 3563.39,268.39 3635,340 3635,2436.93 Rusb.1 CusbG.1@3606.93,2554.54
  Top Layer w100: InputFilter.3 2764.8,555.35 PowerIn.3 3051.77,268.39 PowerIn.2
  Bottom Layer w80: KEY.1 2440.59,1245 2560,1245 2660,1145 v4(2685,1145)
POWERIN: FSIN.1 PowerIn.1 | length 354.2
  Top Layer w100: FSIN.1 3225,660.63 PowerIn.1
REF2.5V: Cref2.2 TLV.12 VREF.6 | length 955.2
  Top Layer w15: TLV.12 620,4915 v1(630,4905)
  Bottom Layer w15: v1(630,4905) 1125,4905 1160.94,4869.06 Cref2.2
  Bottom Layer w20: Cref2.2 1235,4768.74 VREF.6
RST: PR.10 Programmer.5 REST.1 Rrest.1 | length 1511.6
  Top Layer w15: PR.10 3362.8,4807.8 3415,4860 3415,5200 3452,5237 REST.1@3693,5237
  Bottom Layer w15: PR.10 3377.21,4807.8 3482.97,4702.03 3714.48,4702.03 3742.03,4674.48 3742.03,4672.97 3745,4670 3745,4605 Programmer.5 ; Rrest.1 REST.1@3693,5237
RX: ISO.2 P2104_1.3 | length 1151.2
  Top Layer w12: P2104_1.3 710,5690 1235,5690 1330,5785 ISO.2
T_DIS: AMP.9 AMP.16 | length 255.4
  Top Layer w8: AMP.9 820.43,2195.43 831.32,2206.32 988.68,2206.32 999.57,2195.43 AMP.16
TCLK_PA14: PB.9 Programmer.2 | length 2155.3
  Bottom Layer w15: PB.9 2167.97,3764.82 2167.97,3952.97 3070,4855 Programmer.2
TDO_PB3: PB.23 Programmer.6 | length 1405.9
  Bottom Layer w15: PB.23 2967.97,3770.77 2967.97,4317.97 3105,4455 Programmer.6
TMS_PA13: PB.10 Programmer.4 | length 1995.6
  Bottom Layer w15: PB.10 2215,3964.65 3005.36,4755 3355,4755 3455,4655 Programmer.4
TX: ISO.3 P2104_1.4 | length 1107.3
  Top Layer w12: P2104_1.4 473.89,5895 700.89,5668 1248,5668 1315,5735 ISO.3
UGND: ISO.4 P2104_1.5 | length 1063.4
  Top Layer w12: P2104_1.5 542.77,5795 691.77,5646 1257.11,5646 1296.11,5685 ISO.4
USB_N: PB.6 Rusb-.2 | length 1907.2
  Bottom Layer w15: PB.6 1967.97,3770.77 1967.97,3662.03 2035,3595 2810,3595 3145,3260 3145,3071.07 Rusb-.2
USB_P: PB.5 Rusb+.2 | length 1675.6
  Bottom Layer w15: PB.5 2015,3655 2050,3620 2820.36,3620 3170,3270.36 3170,3136.07 Rusb+.2
USBGND: CusbV.2 fbUSBg.1 USB.4 | length 365.4
  Top Layer w15: fbUSBg.1 3357.4,2933.94 3393.46,2970 ; CusbV.2 3393.46,2970 ; USB.4 3543.74,2970 3393.46,2970
USBVDD: CusbV.1 jUSBV.2 USB.1 | length 822.2
  Top Layer w15: jUSBV.2 3015,3370 3140,3245 3140,3110 3245,3005 CusbV.1 3331.54,3045 3410,3045 3435,3020 USB.1
UVDD: ISO.1 P2104_2.4 | length 459.2
  Top Layer w12: P2104_2.4 1070,5895 1130,5835 ISO.1
V100+: AMP.14 Camp+.2 D100+.2 Q1.2 | length 1603.1
  Top Layer w15: AMP.14 948.39,2120 973.39,2095 v3(1080,2095) 1106.65,2121.65 Camp+.2
  Top Layer w40: v3(1645,1935) D100+.2@1723.58,1856.42
  Top Layer w80: Q1.2 1661.26,1666.26 1730,1735 D100+.2
  Bottom Layer w40: v3(1080,2095) 1345,2095 1470,1970 1610,1970 v3(1645,1935)
WE: PL.1 TLV.17 | length 1606.5
  Top Layer w12: TLV.17 870,5062.8 v1(890,5082.8)
  Bottom Layer w12: v1(890,5082.8) 915,5107.8 1121.11,5107.8 1710,4518.91 1710,4328.41 1643.86,4262.27 1570.53,4262.27 PL.1
pads on no net: AMP.1 AMP.2 AMP.6 AMP.7 AMP.10 AMP.11 AMP.13 AMP.15 P2104_1.1 P2104_1.2 P2104_2.1 P2104_2.2 P2104_2.3 P2104_2.5 PB.7 PB.8 PB.11 PB.12 PB.13 PB.14 PB.17 PB.18 PB.19 PB.20 PB.21 PB.22 PB.24 PL.5 PL.6 PowerIn.4 PowerIn.5 PowerIn.6 PR.3 PR.4 PR.5 PR.6 PR.7 PR.8 PR.9 PR.11 PR.12 PR.13 PR.14 PR.15 PR.16 PR.17 PR.18 PR.19 PR.20 PR.22 PR.23 PT.3 PT.4 PT.17 PT.18 PT.20 PT.23 R7.1 VD-7805.4 VREF.1 VREF.3 VREF.7 VREF.8

## Polygon pours and split planes (outlines as drawn)
MCU_GND on Top Layer "Bottom Layer-No Net" (solid, pour order 25): 3800,3475 3800,6045 1460,6045 1460,3475
NetInputFilter_1 on Top Layer "Bottom Layer-No Net" (solid, pour order 35): 2425,1075 2650,1075 2650,1225 2850,1225 2850,1375 2850,1400 2425,1400
NetFuse180+2_1 on Top Layer "Bottom Layer-No Net" (solid, pour order 32): 690,1100 690,695 825,560 840,545 1095,545 1165,545 1240,620 1260,640 1260,1100
OUTPUT on Top Layer "Bottom Layer-No Net" (solid, pour order 27): 1810,175 1810,75 2025,75 2050,100 2050,775 1810,775
INGND on Top Layer "Bottom Layer-No Net" (solid, pour order 24): 2875,950 3625,950 3625,2350 3400,2350 3400,2670 3320,2750 3325,2755 3325,3200 2875,3200
AMP_IN- on Top Layer "Bottom Layer-No Net" (solid, pour order 23): 948.39,2462.88 974.47,2485.1 974.47,2860.76 916.65,2910 791.65,2910 727.18,2855.09 727.18,2492.21 765,2460
AMPGND on Top Layer "Bottom Layer-No Net" (solid, pour order 28): 2865,3075 2865,2825 2555,2825 2550,2820 2550,2610 2550,1575 2110,1575 1875,1575 1800,1575 1750,1575 1750,995 1750,0 0,0 0,3425 700,3425 1300,3425 1300,3075
MCU_GND on Bottom Layer "Bottom Layer-No Net" (solid, pour order 26): 3815,3470 3815,6040 1445,6040 1445,3470
AMPGND on Bottom Layer "Bottom Layer-No Net" (solid, remove dead copper, pour order 29): 2550,3075 2550,2820 2550,1575 1750,1575 1750,0 0,0 0,3425 1300,3425 1300,3075

## Keep-outs
Keep-Out Layer:
  lines w8: 0,0 3800,0 3800,6360 0,6360 0,0

## Silkscreen, mask and mechanical layers (free items; w line width, h text height)
Top Overlay:
  lines w10: 1675,4202.8 1675,5542.8 ; 2245,5717.8 3525,5717.8 ; 2245,5722.8 2245,5902.8 1305,5902.8 1305,5717.8 1305,5677.8 1305,5162.8 1305,3497.8 1765,3497.8 3035,3497.8 3525,3497.8 3525,4067.8 3525,5702.8
  text "G" at 3770,4175 h25
  text "G" at 3770,3865 h25
  text "G" at 725,3405 h60
  text "G" at 825,3405 h60
  text "S" at 925,3405 h60
  text "S" at 1020,3405 h60
  text "High Voltage" at 1680,2815 h60
  text "LSE Piezo Driver 1.0" at 320,200 h60
  text "2023-12-09" at 320,110 h60
  text "G" at 1640,25 h60
  text "G" at 1745,25 h60
  text "S" at 1840,25 h60
  text "S" at 1940,25 h60

## Text inside footprints (layer, text, board x,y; h text height)
D_1: Top Overlay "+" at 3495,775 h30 r270
PB: Top Overlay "2" at 1715,3797.8 h30; Top Overlay "1" at 1715,3697.8 h30
PL: Top Overlay "2" at 1605,4407.8 h30 r270; Top Overlay "1" at 1505,4387.8 h30 r270; Top Overlay "7" at 1505,3947.8 h30 r270; Top Overlay "8" at 1605,3947.8 h30 r270
PowerIn: Top Overlay "+" at 3270,405 h30; Top Overlay "-" at 3111,321 h30
PR: Top Overlay "2" at 3285,5307.8 h30 r270; Top Overlay "1" at 3185,5307.8 h30 r270
PT: Top Overlay "2" at 1715,5477.8 h30; Top Overlay "1" at 1715,5377.8 h30; Top Overlay "25" at 3075,5377.8 h30; Top Overlay "26" at 3075,5477.8 h30